# Altium PCB REV11_PCB_DESIGN_LAYOUT.PcbDoc (part 2 of 3)
Units mm, origin at the board's own origin, x right, y up, seen from the top; angles counter-clockwise.
Board outline 97.79 x 93.98 mm, 4 copper layers (L1S-TOP, L2- GND PLANE, L3 - PWR PLANE, L4-BOTTOM), stack 1.636 mm thick; 53 components, 27 nets, 164 pads, 437 vias.
Unrouted connection lines stored in the file: 146.
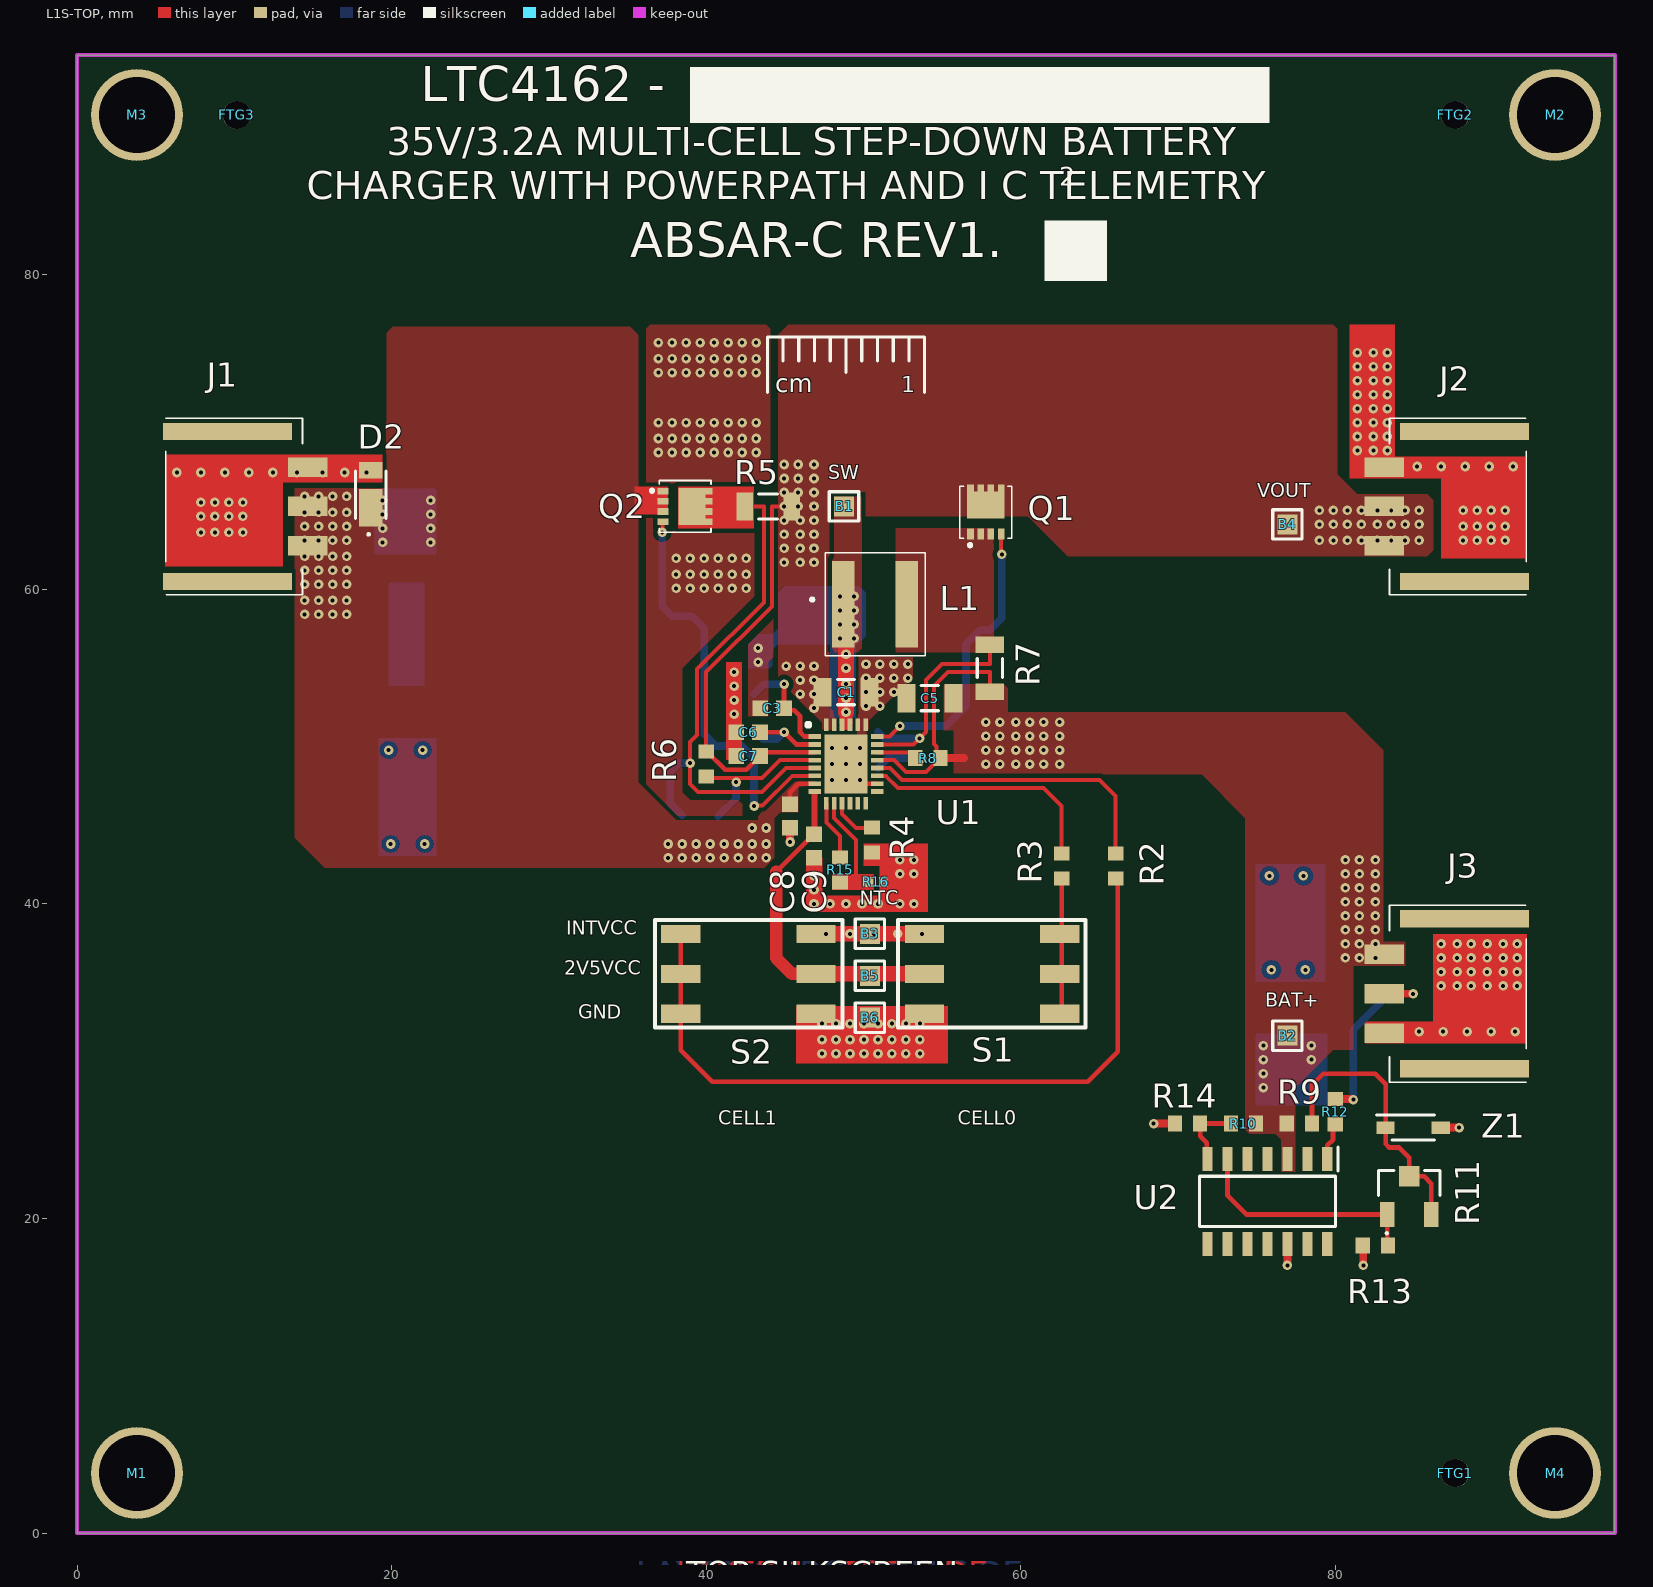
[diagram p0: L1S-TOP view]

## Silkscreen, mask and mechanical layers (free items; w line width, h text height) (continued)
Assembly Drawing Top: (continued)
  text "PCB : BOTTOM" at 128.333,14.81 h1.27
  text "4X" at 167.634,11.891 h1.27
  text "DETAIL \"C\"" at 100.584,11.684 h3.81
  text "STAND-OFF,NYLON" at 160.649,8.716 h1.27
  text "SNAP ON" at 163.824,5.541 h1.27
  text "PCB : BOTTOM" at 191.427,4.267 h2.54
  text "DETAIL \"C\"" at 185.852,-4.928 h1.52
  text "(6 PLCS) : KEYSTONE 575-4" at 206.172,-6.96 h1.27
  text "PCB TOP" at 166.167,-11.405 h1.27
  text "9.  MARK EACH LTC PART NUMBER AND DEMO BOARD SKU# WITH BLACK PERMANENT MARKER AS SHOWN IN THE TABLE BELOW:" at 1.27,-13.335 h2.54
  text "EXAMPLE: FOR DC2308A-A, BOX 9A SHOULD SHOW \"LAD\" AND BOX 9B SHOULD SHOW \"A\"." at 4.445,-16.51 h2.54
  text "MPPT OFF BY DEFAULT" at 14.097,-22.479 h3.05
  text "MPPT ON BY DEFAULT" at 66.802,-22.479 h3.05
  text "PCB BOTTOM" at 162.992,-27.28 h1.27
  text "SKU #" at 9.652,-28.194 h3.05
  text "U1" at 36.322,-28.194 h3.05
  text "SKU #" at 62.992,-28.194 h3.05
  text "U1" at 90.297,-28.194 h3.05
  text "DC2038A-A" at 7.747,-33.274 h3.05
  text "LTC4162EUFD-LAD" at 27.432,-33.274 h3.05
  text "DC2038A-J" at 59.182,-33.274 h3.05
  text "LTC4162EUFD-LADM" at 78.867,-33.274 h3.05
  text "OPTICS" at 180.491,-36.3 h1.9
  text "DC2038A-B" at 7.747,-37.084 h3.05
  text "LTC4162EUFD-L40" at 27.432,-37.084 h3.05
  text "DC2038A-K" at 59.182,-37.084 h3.05
  text "LTC4162EUFD-L40M" at 78.867,-37.084 h3.05
  text "APPROVALS" at 149.708,-37.516 h3.81
  text "LABs" at 180.301,-39.247 h1.9
  text "DC2038A-C" at 7.747,-40.894 h3.05
  text "LTC4162EUFD-L41" at 27.432,-40.894 h3.05
  text "DC2038A-L" at 59.182,-40.894 h3.05
  text "LTC4162EUFD-L41M" at 78.867,-40.894 h3.05
  text "PCB DES." at 144.907,-42.672 h2.54
  text "NC" at 156.464,-42.672 h2.54
  text "DC2038A-D" at 7.747,-44.704 h3.05
  text "LTC4162EUFD-L42" at 27.432,-44.704 h3.05
  text "DC2038A-M" at 59.182,-44.704 h3.05
  text "LTC4162EUFD-L42M" at 78.867,-44.704 h3.05
  text "APP ENG." at 144.653,-45.847 h2.54
  text "ZP" at 156.464,-45.847 h2.54
  text "TITLE:" at 173.965,-46.406 h2.54
  text "TOP ASSEMBLY DRAWING:" at 181.585,-46.406 h2.54
  text "DC2038A-E" at 7.747,-48.514 h3.05
  text "LTC4162EUFD-FAD" at 27.432,-48.514 h3.05
  text "DC2038A-N" at 59.182,-48.514 h3.05
  text "LTC4162EUFD-FADM" at 78.867,-48.514 h3.05
  text "35V/3.2A MULTI-CELL STEP DOWN BATTERY" at 173.99,-49.53 h2.54
  text "DC2038A-F" at 7.747,-52.324 h3.05
  text "LTC4162EUFD-FST" at 27.432,-52.324 h3.05
  text "DC2038A-O" at 59.182,-52.324 h3.05
  text "LTC4162EUFD-FSTM" at 78.867,-52.324 h3.05
  text "CHARGER WITH POWERPATH AND I2C TELEMETRY" at 173.99,-52.705 h2.54
  text "DC2038A-G" at 7.747,-56.134 h3.05
  text "LTC4162EUFD-FFS" at 27.432,-56.134 h3.05
  text "DC2038A-P" at 59.182,-56.134 h3.05
  text "LTC4162EUFD-FFSM" at 78.867,-56.134 h3.05
  text "SIZE" at 173.965,-58.471 h2.54
  text "IC NO." at 182.22,-58.471 h2.54
  text "REV." at 224.765,-58.471 h2.54
  text "LTC4162" at 194.945,-59.055 h3.17
  text "DC2038A-H" at 7.747,-59.944 h3.05
  text "LTC4162EUFD-SAD" at 27.432,-59.944 h3.05
  text "DC2038A-Q" at 59.182,-59.944 h3.05
  text "LTC4162EUFD-SADM" at 78.867,-59.944 h3.05
  text "N/A" at 174.6,-62.281 h3.05
  text "11" at 226.695,-62.865 h3.81
  text "ABSAR-C BATTERY CHARGER" at 181.483,-63.627 h3.17
  text "DC2038A-I" at 7.747,-63.754 h3.05
  text "LTC4162EUFD-SST" at 27.432,-63.754 h3.05
  text "DC2038A-R" at 59.182,-63.754 h3.05
  text "LTC4162EUFD-SSTM" at 78.867,-63.754 h3.05
  text "SCALE = NONE" at 148.717,-66.802 h2.54
  text "SHT 1 of 2" at 217.272,-66.853 h2.54